# Altium PCB 7SegmentDriver.PcbDoc
Units mm, origin at the board's own origin, x right, y up, seen from the top; angles counter-clockwise.
Board outline 50 x 60 mm, 2 copper layers (Top Layer, Bottom Layer), stack 1.621 mm thick; 24 components, 24 nets, 90 pads, 14 vias.
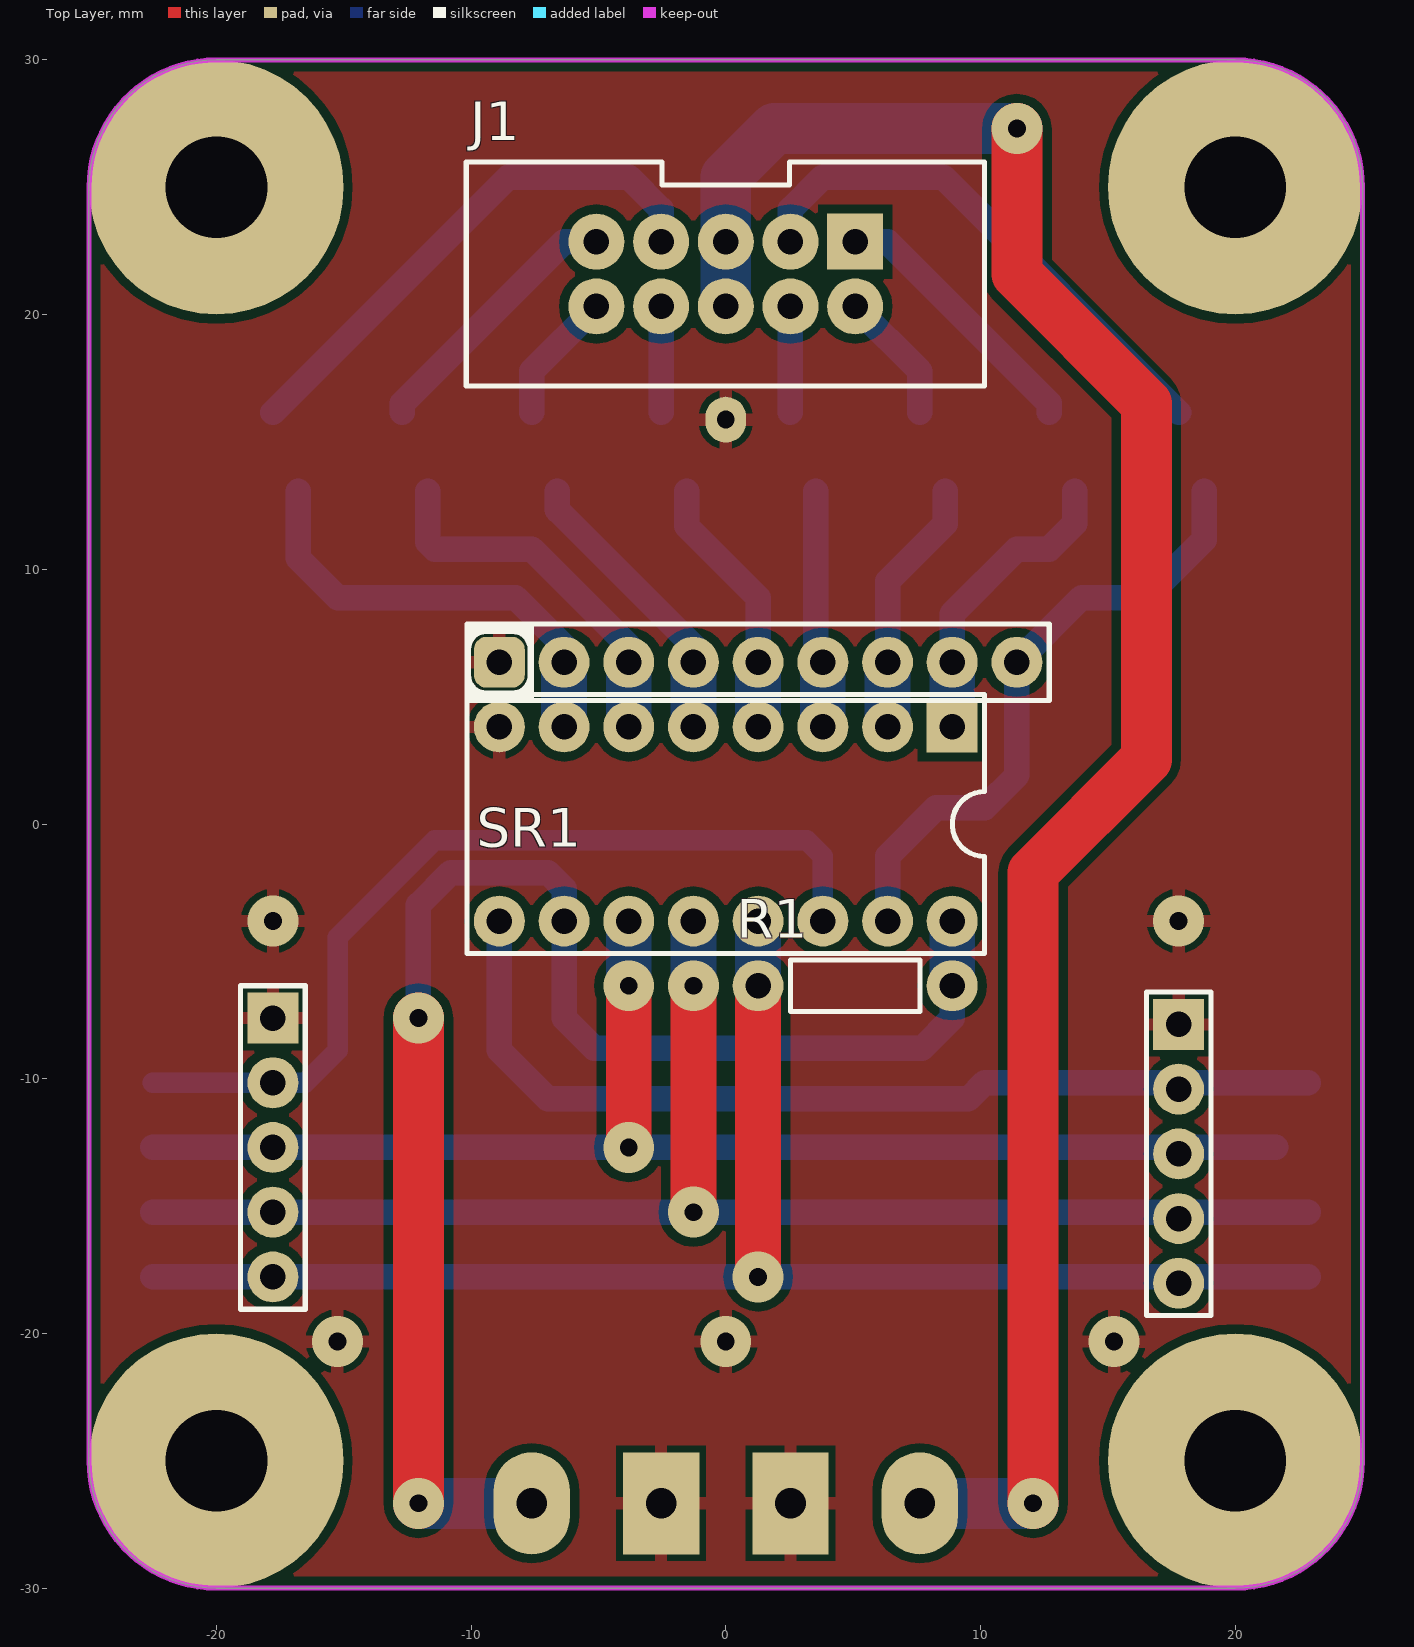
[diagram p0: Top Layer view]
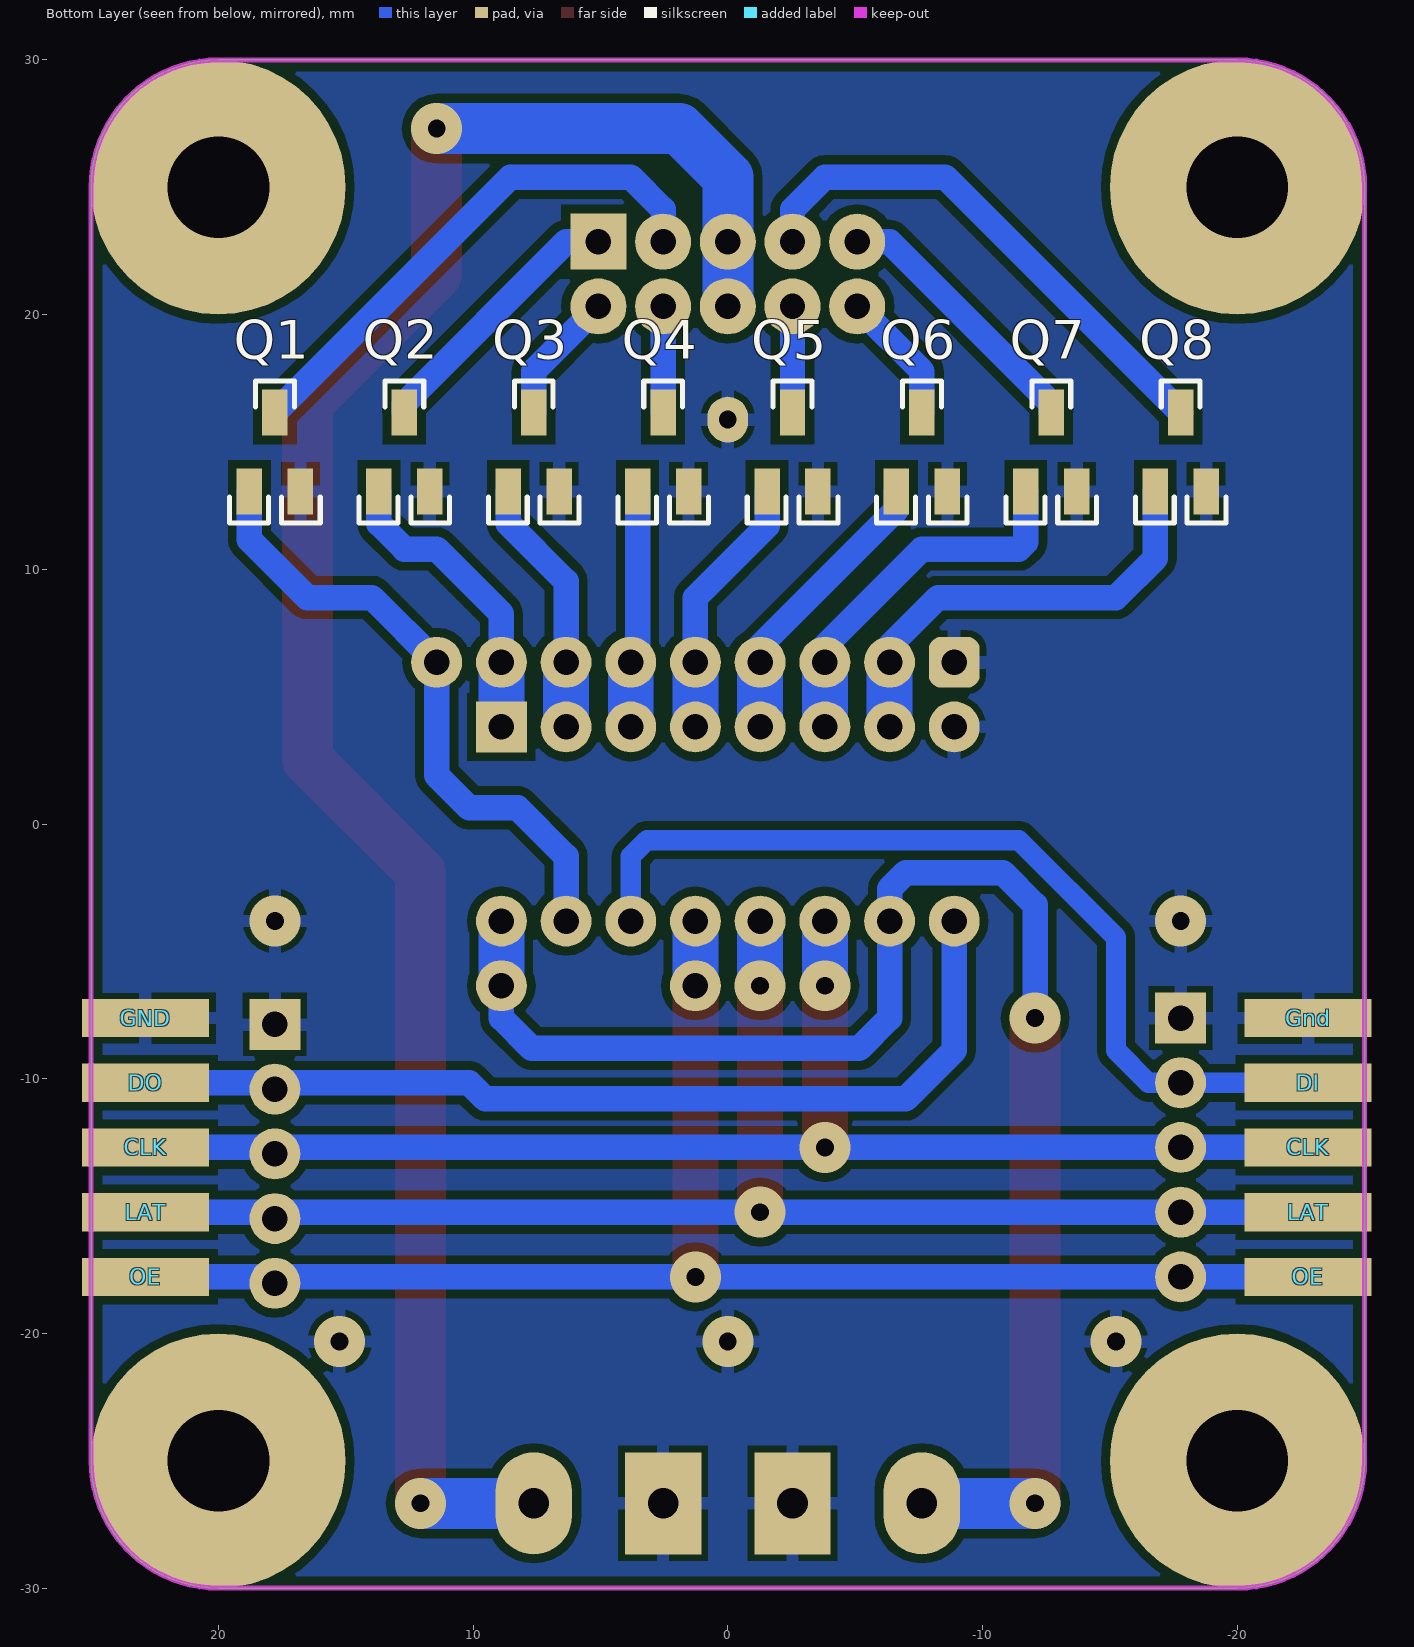
[diagram p1: Bottom Layer view, seen from below]
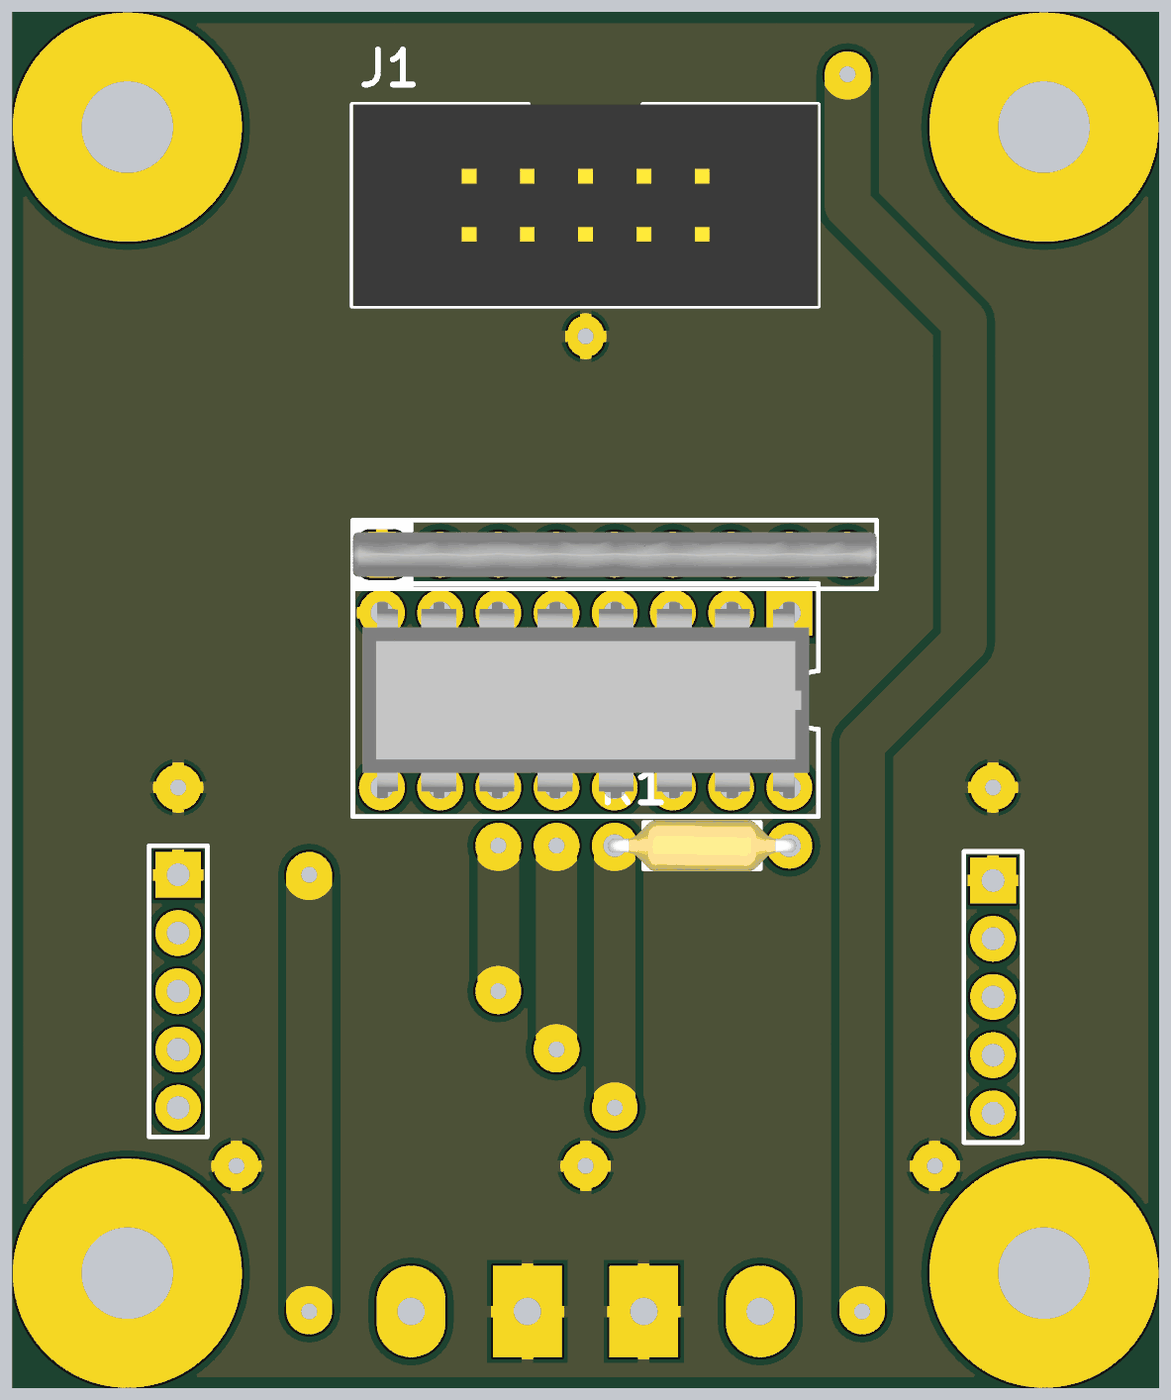
[diagram p2: 3D render of the assembled board from above, using the file's embedded part models]
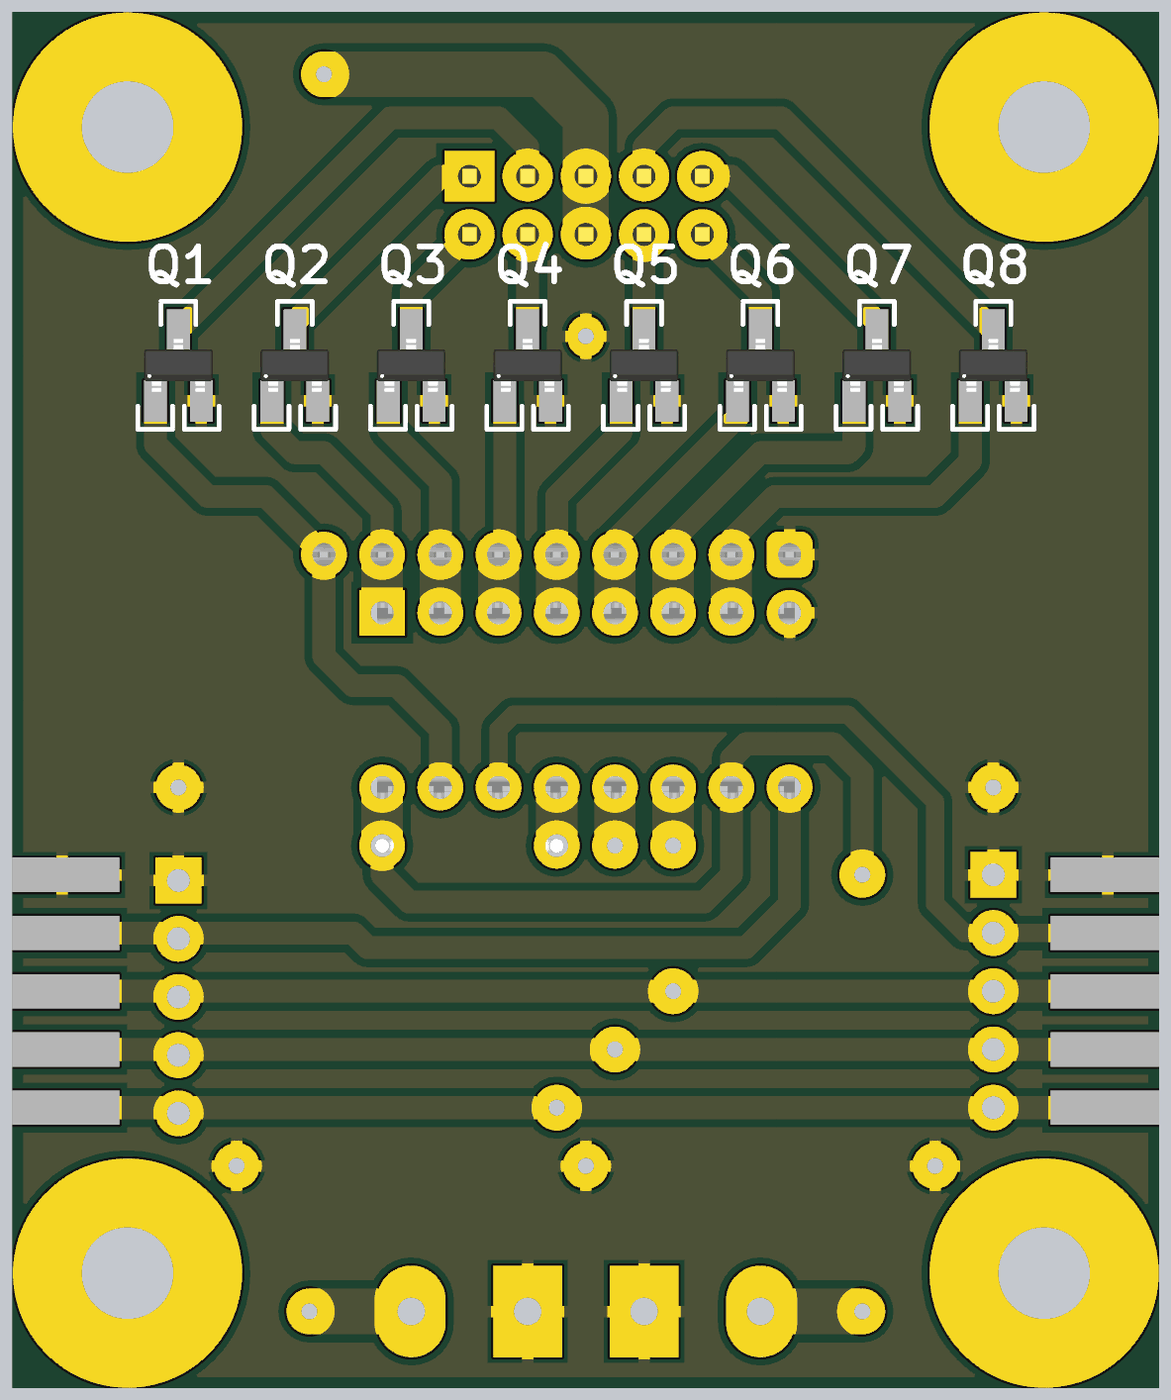
[diagram p3: 3D render of the assembled board from below, using the file's embedded part models]

## Layer stack, top to bottom
Top Solder: solder mask 0.0102, Solder Resist, Dk 3.5
Top Layer: signal copper 0.0356
Dielectric 1: dielectric 1.55, FR-4, Dk 4.8
Bottom Layer: signal copper 0.0356
Bottom Solder: solder mask 0.0102, Solder Resist, Dk 3.5

## Board outline
-25,-25 ccw(c-20,-25) -20,-30 20,-30 ccw(c20,-25) 25,-25 25,25 ccw(c20,25) 20,30 -20,30 ccw(c-20,25) -25,25

## Design rules (kind name [scope] priority, off if disabled: settings)
BoardOutlineClearance [All] p1: gap=0 ignorepadtopadclearanceinfootprint=FALSE
Clearance [All] p1: gap=0.35 ignorepadtopadclearanceinfootprint=TRUE
ComponentClearance ComponentClearance_1 [(InPolygon AND InComponent('P1'))] p1: gap=0 collisioncheckmode=3 verticalgap=0.254 showdistances=FALSE
ComponentClearance [All] p2: gap=0 collisioncheckmode=3 verticalgap=0.254 showdistances=FALSE
HoleSize [All] p1: absolutevalues=TRUE maxlimit=3.81 minlimit=0.711 maxpercent=80.000 minpercent=20.000
HoleToHoleClearance [All] p1: gap=0.762 allowstackedmicrovias=TRUE
MinimumSolderMaskSliver [All] p1 off: minsoldermaskwidth=0.254
MinimumSolderMaskSliver SilkscreenOverComponentPads [All] p2 off: minsoldermaskwidth=0.254
PasteMaskExpansion [All] p1 off: expansion=0
PlaneConnect [All] p1: planeconnectstyle=Relief reliefexpansion=0.508 reliefentries=4 reliefconductorwidth=0.305 reliefairgap=0.254
PolygonConnect [All] p1: connectstyle=Relief reliefconductorwidth=0.5 reliefentries=4 polygonreliefangle="90 Angle" airgapwidth=0.254
RoutingVias [All] p1: holewidth=0.711 width=1.778 viastyle="Through Hole" minholewidth=0.711 minwidth=1.524 maxholewidth=0.991 maxwidth=2.54
SilkToSilkClearance [All] p1 off: silktosilkclearance=0.254
SolderMaskExpansion [All] p1 off: expansion=0.102
Width [All] p1: maxlimit=2.54 minlimit=0.254 preferedwidth=0.305
23 further rules are at their usual default settings.

## Components (designator, comment, footprint, x,y, rotation, side; value= is the part's Value field where it differs from the comment)
CLK "" "solder pad 1x5mm" 22.86,-12.7 r90 top
CLK "" "solder pad 1x5mm" -22.78,-12.7 r90 top
DI "" "solder pad 1x5mm" -22.78,-10.16 r90 top
DO "" "solder pad 1x5mm" 22.86,-10.16 r90 top
GND "" "solder pad 1x5mm" 22.86,-7.62 r90 top
Gnd "" "solder pad 1x5mm" -22.78,-7.62 r90 top
IN "Header 5" HDR1X5 -17.78,-7.62 r270 top
J1 "IDC 10Pin" "IDC 10 Pin" 0,21.59 r180 top
LAT "" "solder pad 1x5mm" 22.86,-15.24 r90 top
LAT "" "solder pad 1x5mm" -22.78,-15.24 r90 top
OE "" "solder pad 1x5mm" 22.86,-17.78 r90 top
OE "" "solder pad 1x5mm" -22.78,-17.78 r90 top
OUT "Header 5" HDR1X5 17.78,-7.87 r270 top
Q1 "?" "SOT23 Handsoldering" 17.78,14.605 r270 bottom
Q2 "?" "SOT23 Handsoldering" 12.7,14.605 r270 bottom
Q3 "?" "SOT23 Handsoldering" 7.62,14.605 r270 bottom
Q4 "?" "SOT23 Handsoldering" 2.54,14.605 r270 bottom
Q5 "?" "SOT23 Handsoldering" -2.54,14.605 r270 bottom
Q6 "?" "SOT23 Handsoldering" -7.62,14.605 r270 bottom
Q7 "?" "SOT23 Handsoldering" -12.7,14.605 r270 bottom
Q8 "?" "SOT23 Handsoldering" -17.78,14.605 r270 bottom
R1 "AX0.3\"" "Axial 0.3\" 1/4W" 5.08,-6.35 r180 top
RN1 "RN?" "SIP9 1/8W" 1.27,6.35 r0 top
SR1 "74HC595N" 74HC595N 0,0 r180 top

## Footprints (in the part's own frame and the unit in brackets; to place one, negate y for a bottom-side part, rotate by r counter-clockwise, add the part's x,y. Pads: shape width x height; smd on the part's side, far side on the other; paste and mask are expansions set on the pad)
74HC595N [mm] "74HC595N 8 bit shift register"
  rect 2x2 hole 1: 1(-8.89,-3.81)
  round 2 hole 1: 2(-6.35,-3.81) 3(-3.81,-3.81) 4(-1.27,-3.81) 5(1.27,-3.81) 6(3.81,-3.81) 7(6.35,-3.81) 8(8.89,-3.81) 9(8.89,3.81) 10(6.35,3.81) 11(3.81,3.81) 12(1.27,3.81) 13(-1.27,3.81) 14(-3.81,3.81) 15(-6.35,3.81) 16(-8.89,3.81)
  silkscreen extent -10.16,-5.08 10.16,5.08, body extent -9.75,-4.26 9.75,4.27, height 3.69
"Axial 0.3\" 1/4W" [mm]
  round 2 hole 1: 1(-3.81,0) 2(3.81,0)
  silkscreen extent -2.54,-1.02 2.54,1.02, body extent -4.11,-1.12 4.11,1.13, height 2.18
HDR1X5 [mm] "Connector; Header; 5 Position"
  rect 2x2 hole 1: 1(0,0)
  round 2 hole 1: 2(2.54,0) 3(5.08,0) 4(7.62,0) 5(10.16,0)
  silkscreen extent -1.27,-1.27 11.43,1.27
"IDC 10 Pin" [mm] "10pin 2x5 IDC box header"
  rect 2.2x2.2 hole 1: 1(-5.08,-1.27)
  round 2.2 hole 1: 2(-5.08,1.27) 3(-2.54,-1.27) 4(-2.54,1.27) 5(0,-1.27) 6(0,1.27) 7(2.54,-1.27) 8(2.54,1.27) 9(5.08,-1.27) 10(5.08,1.27)
  silkscreen extent -10.15,-4.4 10.19,4.4, body extent -10.15,-4.4 10.15,4.4, height 9
"SIP9 1/8W" [mm] "SIP9 Resistor Network common bus"
  rrect50% 2x2 hole 1: 1(-10.16,0)
  round 2 hole 1: 2(-7.62,0) 3(-5.08,0) 4(-2.54,0) 5(0,0) 6(2.54,0) 7(5.08,0) 8(7.62,0) 9(10.16,0)
  silkscreen extent -11.43,-1.5 11.43,1.5, body extent -11.43,-0.97 11.43,0.97, height 8.01
"solder pad 1x5mm" [mm] "solderpad 1x5mm top"
  rect 1.5x5 smd far side: 1(0,0)
"SOT23 Handsoldering" [mm] "SOT23-3 for handsoldering"
  rect 1.8x1 smd: 1(1.55,-1) 2(1.55,1) 3(-1.55,0)
  silkscreen extent -2.79,-1.78 2.79,1.78, body extent -1.15,-1.5 1.15,1.5, height 1.1

## Part data
CLK CLK DI DO GND Gnd LAT LAT OE OE: library part "Solder pad 1x5mm"
IN OUT: "Header, 5-Pin", LatestRevisionDate=17-Jul-2002, LatestRevisionNote="Re-released for DXP Platform.", Publisher="Altium Limited"
Q1 Q2 Q3 Q4 Q5 Q6 Q7 Q8: library part AO3400, "AO3400 n-mosfet 30v 5.8A SOT23"
R1: library part "Axial 0.3\" 1/4W"
RN1: library part "SIP9 Resistor Network common bus", "SIP9 Resistor Network common bus"

## Free pads (board coordinates)
  round 10 hole 4: 2(-20,-25) 2(-20,25) 2(20,-25) 2(20,25)
  oval 1.6x1.8 hole 0.7: 3(0,15.875)
  oval 3x4 hole 1.2: 5(-7.62,-26.67) 5(7.62,-26.67)
  rect 3x4 hole 1.2: 5(-2.54,-26.67) 5(2.54,-26.67)

## Via types
v1: diameter 2, hole 0.7, Top Layer to Bottom Layer, 14 vias

## Nets (pads, with @x,y where several pads share a name; then routed paths per layer and width w, separated by ;. In a path a pad name is that pad's centre, name@x,y a point inside that pad or via, vN(x,y) a via of type N, cw(c..) or ccw(c..) an arc to the next point about the centre after c; other vN are vias at no path point)
5V: pad.5@-7.62,-26.67 R1.1 SR1.10 SR1.16 | length 59.6
  Top Layer w2: v1(-12.065,-26.67) v1(-12.065,-7.62)
  Bottom Layer w1: v1(-12.065,-7.62) -12.065,-3.175 -10.795,-1.905 -6.985,-1.905 -6.35,-2.54 SR1.10 -6.35,-7.62 -5.16,-8.81 7.7,-8.81 8.89,-7.62 R1.1
  Bottom Layer w1.8: R1.1 SR1.16
  Bottom Layer w2: v1(-12.065,-26.67) pad.5@-7.62,-26.67
12V: J1.5 J1.6 pad.5@7.62,-26.67 | length 79.7
  Top Layer w2: v1(11.43,27.305) 11.43,21.59 16.51,16.51 16.51,2.54 12.065,-1.905 v1(12.065,-26.67)
  Bottom Layer w2: J1.6 J1.5 0,25.4 1.905,27.305 v1(11.43,27.305) ; pad.5@7.62,-26.67 v1(12.065,-26.67)
Clock: CLK.1 IN.3 OUT.3 SR1.11 | length 53
  Top Layer w1.8: v1(-3.81,-12.7) v1(-3.81,-6.35)
  Bottom Layer w1: CLK.1@-22.5,-12.7 IN.3 v1(-3.81,-12.7) CLK.1@21.59,-12.7
  Bottom Layer w1.8: v1(-3.81,-6.35) SR1.11
Data-In: DI.1 IN.2 SR1.14 | length 35.7
  Bottom Layer w0.8: DI.1@-22.5,-10.16 IN.2 -16.51,-10.16 -15.24,-8.89 -15.24,-4.445 -11.43,-0.635 3.175,-0.635 3.81,-1.27 SR1.14
Data-Out: DO.1 OUT.2 SR1.9 | length 37.9
  Bottom Layer w1: SR1.9 -8.89,-8.89 -6.985,-10.795 9.525,-10.795 10.16,-10.16 DO.1
GND: GND.1 Gnd.1 IN.1 OUT.1 pad.3 pad.5@2.54,-26.67 pad.5@-2.54,-26.67 Q1.2 Q2.2 Q3.2 Q4.2 Q5.2 Q6.2 Q7.2 Q8.2 RN1.1 SR1.8
  other v1: -15.24,-20.32 0,-20.32 15.24,-20.32 -17.78,-3.81 17.78,-3.81
Latch: IN.4 LAT.1 OUT.4 SR1.12 | length 56.8
  Top Layer w1.8: v1(-1.27,-15.24) v1(-1.27,-6.35)
  Bottom Layer w1: LAT.1@-22.5,-15.24 IN.4 v1(-1.27,-15.24) LAT.1@22.86,-15.24
  Bottom Layer w1.8: v1(-1.27,-6.35) SR1.12
NetJ1_1: J1.1 Q2.3 | length 10.6
  Bottom Layer w1: J1.1 6.35,22.86 12.7,16.51 Q2.3
NetJ1_2: J1.2 Q3.3 | length 5.2
  Bottom Layer w1: J1.2 7.62,17.78 Q3.3
NetJ1_3: J1.3 Q1.3 | length 20.9
  Bottom Layer w1: J1.3 2.54,24.13 3.81,25.4 8.535,25.4 Q1.3
NetJ1_4: J1.4 Q4.3 | length 4.2
  Bottom Layer w1: Q4.3 J1.4
NetJ1_7: J1.7 Q8.3 | length 20.9
  Bottom Layer w1: Q8.3 -8.535,25.4 -3.81,25.4 -2.54,24.13 J1.7
NetJ1_8: J1.8 Q5.3 | length 4.2
  Bottom Layer w1: Q5.3 J1.8
NetJ1_9: J1.9 Q7.3 | length 10.6
  Bottom Layer w1: Q7.3 -12.7,16.51 -6.35,22.86 J1.9
NetJ1_10: J1.10 Q6.3 | length 5.2
  Bottom Layer w1: Q6.3 -7.62,17.78 J1.10
NetQ1_1: Q1.1 RN1.9 SR1.15 | length 24.6
  Bottom Layer w1: SR1.15 6.35,-1.27 8.255,0.635 10.16,0.635 11.43,1.905 RN1.9 13.97,8.89 16.51,8.89 18.78,11.16 Q1.1
NetQ2_1: Q2.1 RN1.8 SR1.1 | length 12
  Bottom Layer w1: RN1.8 8.89,8.255 11.43,10.795 12.7,10.795 13.7,11.795 Q2.1
  Bottom Layer w1.8: SR1.1 RN1.8
NetQ3_1: Q3.1 RN1.7 SR1.2 | length 10.2
  Bottom Layer w1: RN1.7 6.35,9.525 8.62,11.795 Q3.1
  Bottom Layer w1.8: SR1.2 RN1.7
NetQ4_1: Q4.1 RN1.6 SR1.3 | length 9.4
  Bottom Layer w1: Q4.1 3.54,6.62 RN1.6
  Bottom Layer w1.8: SR1.3 RN1.6
NetQ5_1: Q5.1 RN1.5 SR1.4 | length 10.4
  Bottom Layer w1: Q5.1 -1.54,11.7 1.27,8.89 RN1.5
  Bottom Layer w1.8: SR1.4 RN1.5
NetQ6_1: Q6.1 RN1.4 SR1.5 | length 11.5
  Bottom Layer w1: Q6.1 -6.62,12.335 -6.43,12.145 -6.426,12.145 -1.27,6.989 RN1.4
  Bottom Layer w1.8: SR1.5 RN1.4
NetQ7_1: Q7.1 RN1.3 SR1.6 | length 14.7
  Bottom Layer w1: Q7.1 -11.7,11.065 -11.43,10.795 -7.62,10.795 -3.81,6.985 RN1.3
  Bottom Layer w1.8: SR1.6 RN1.3
NetQ8_1: Q8.1 RN1.2 SR1.7 | length 17.7
  Bottom Layer w1: Q8.1 -16.78,10.43 -15.24,8.89 -8.255,8.89 -6.35,6.985 RN1.2
  Bottom Layer w1.8: SR1.7 RN1.2
OE: IN.5 OE.1 OUT.5 R1.2 SR1.13 | length 59.3
  Top Layer w1.8: v1(1.27,-17.78) R1.2
  Bottom Layer w1: OE.1@-22.5,-17.78 IN.5 v1(1.27,-17.78) OE.1@22.86,-17.78
  Bottom Layer w1.8: R1.2 SR1.13

## Polygon pours and split planes (outlines as drawn)
GND on Top Layer "GND_L01_P004" (solid, pour order 4): -25.307,-24.693 -25.307,25.307 -20.307,30.307 19.693,30.307 24.693,25.307 24.693,-24.693 19.693,-29.693 -20.307,-29.693
GND on Bottom Layer "GND_L02_P002" (solid, pour order 2): -25,-25 -25,25 -20,30 20,30 25,25 25,-25 20,-30 -20,-30

## Keep-outs
Keep-Out Layer:
  the board outline again, w0.2

## Silkscreen, mask and mechanical layers (free items; w line width, h text height)
Mechanical 2:
  drawing of 3 lines, arcs and shapes, not listed
  text "2 1 V 8 7 / 3 4 V 5 6" at -8.763,9.017 h1.8
  text "Ver 1.0b" at 23.495,5.08 h1.8 r90
  text "5V" at -8.89,-21.59 h1.9
  text "G" at -3.175,-21.59 h1.9
  text "G" at 1.905,-21.59 h1.9
  text "Vcc" at 5.334,-21.59 h1.9